# Altium PCB PCB1.PcbDoc
Units mil, origin at the board's own origin, x right, y up, seen from the top; angles counter-clockwise.
Board outline 2700 x 2100 mil, 2 copper layers (Top Layer, Bottom Layer), stack 62.8 mil thick; 15 components, 31 nets, 62 pads, 20 vias.
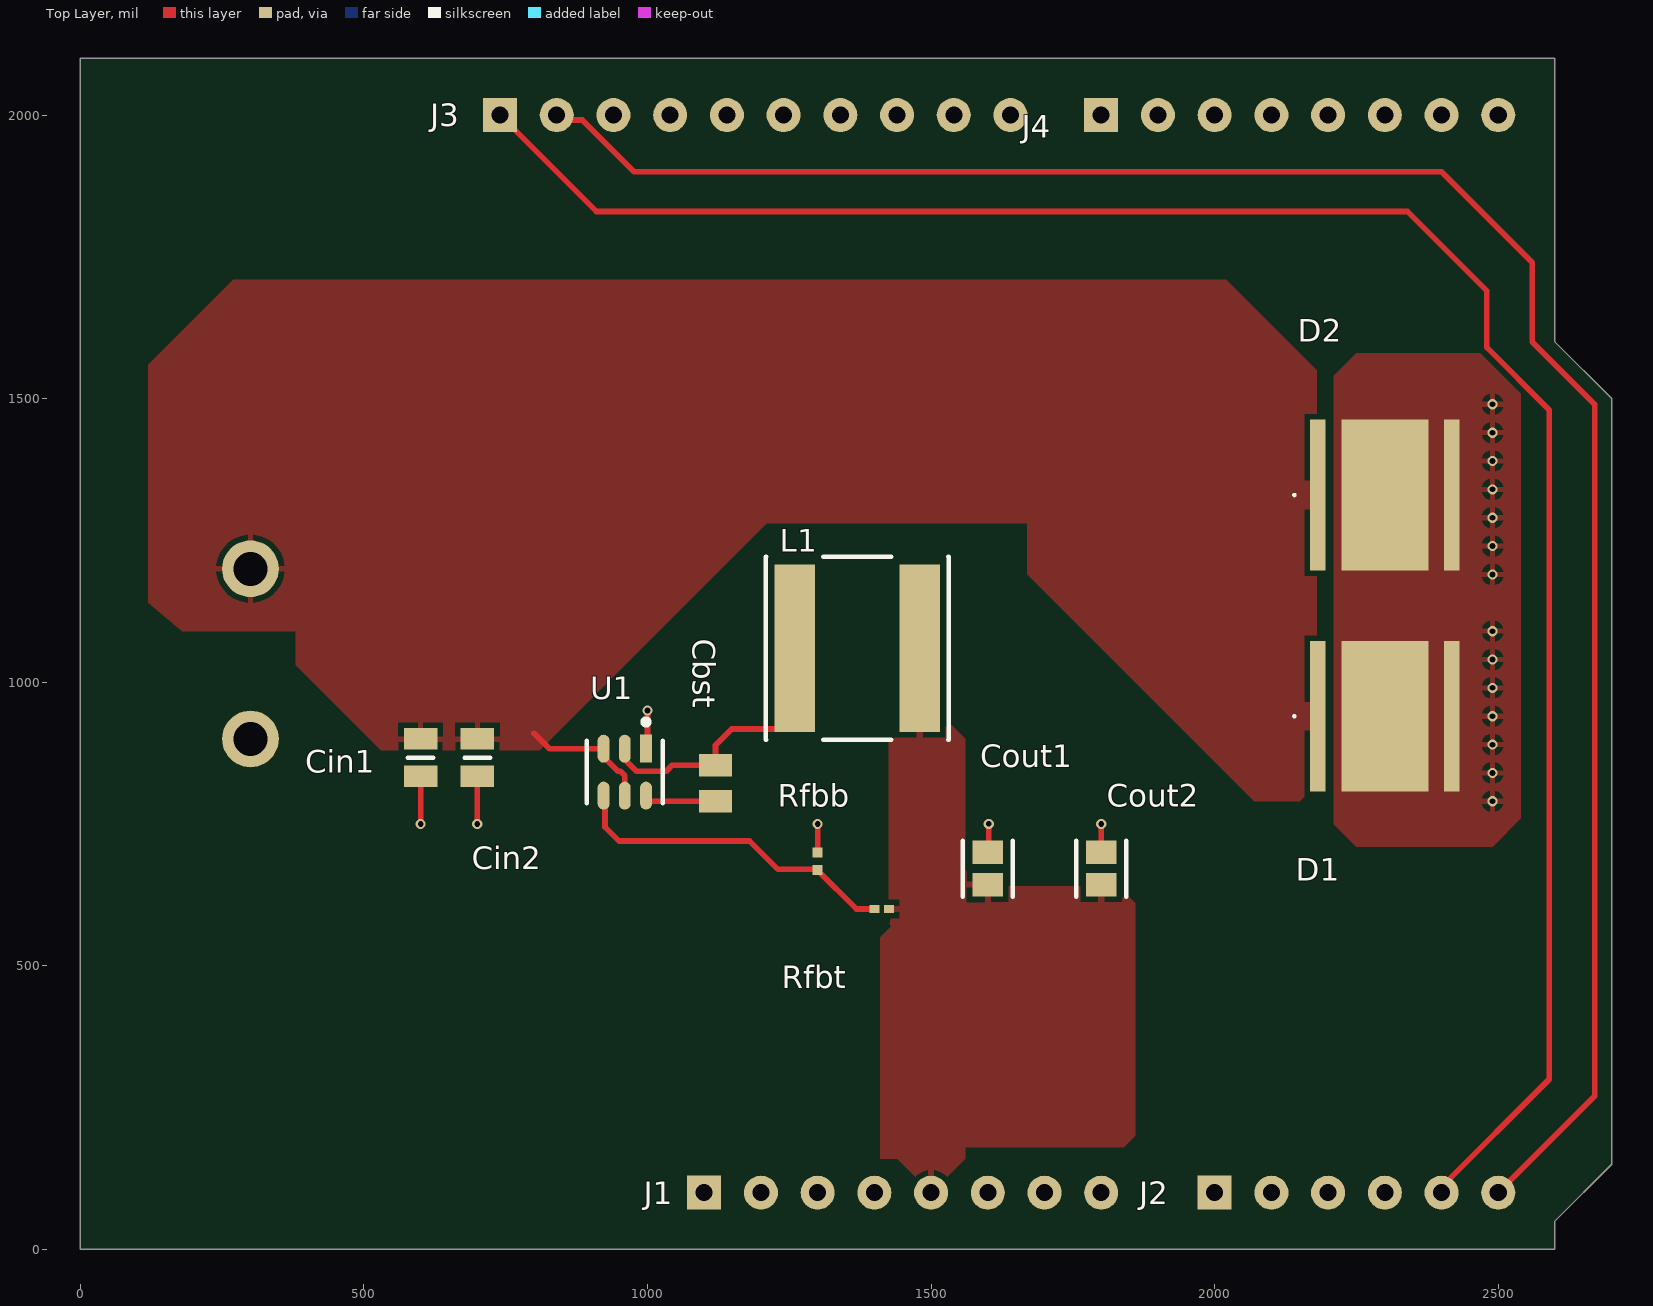
[diagram p0: Top Layer view]
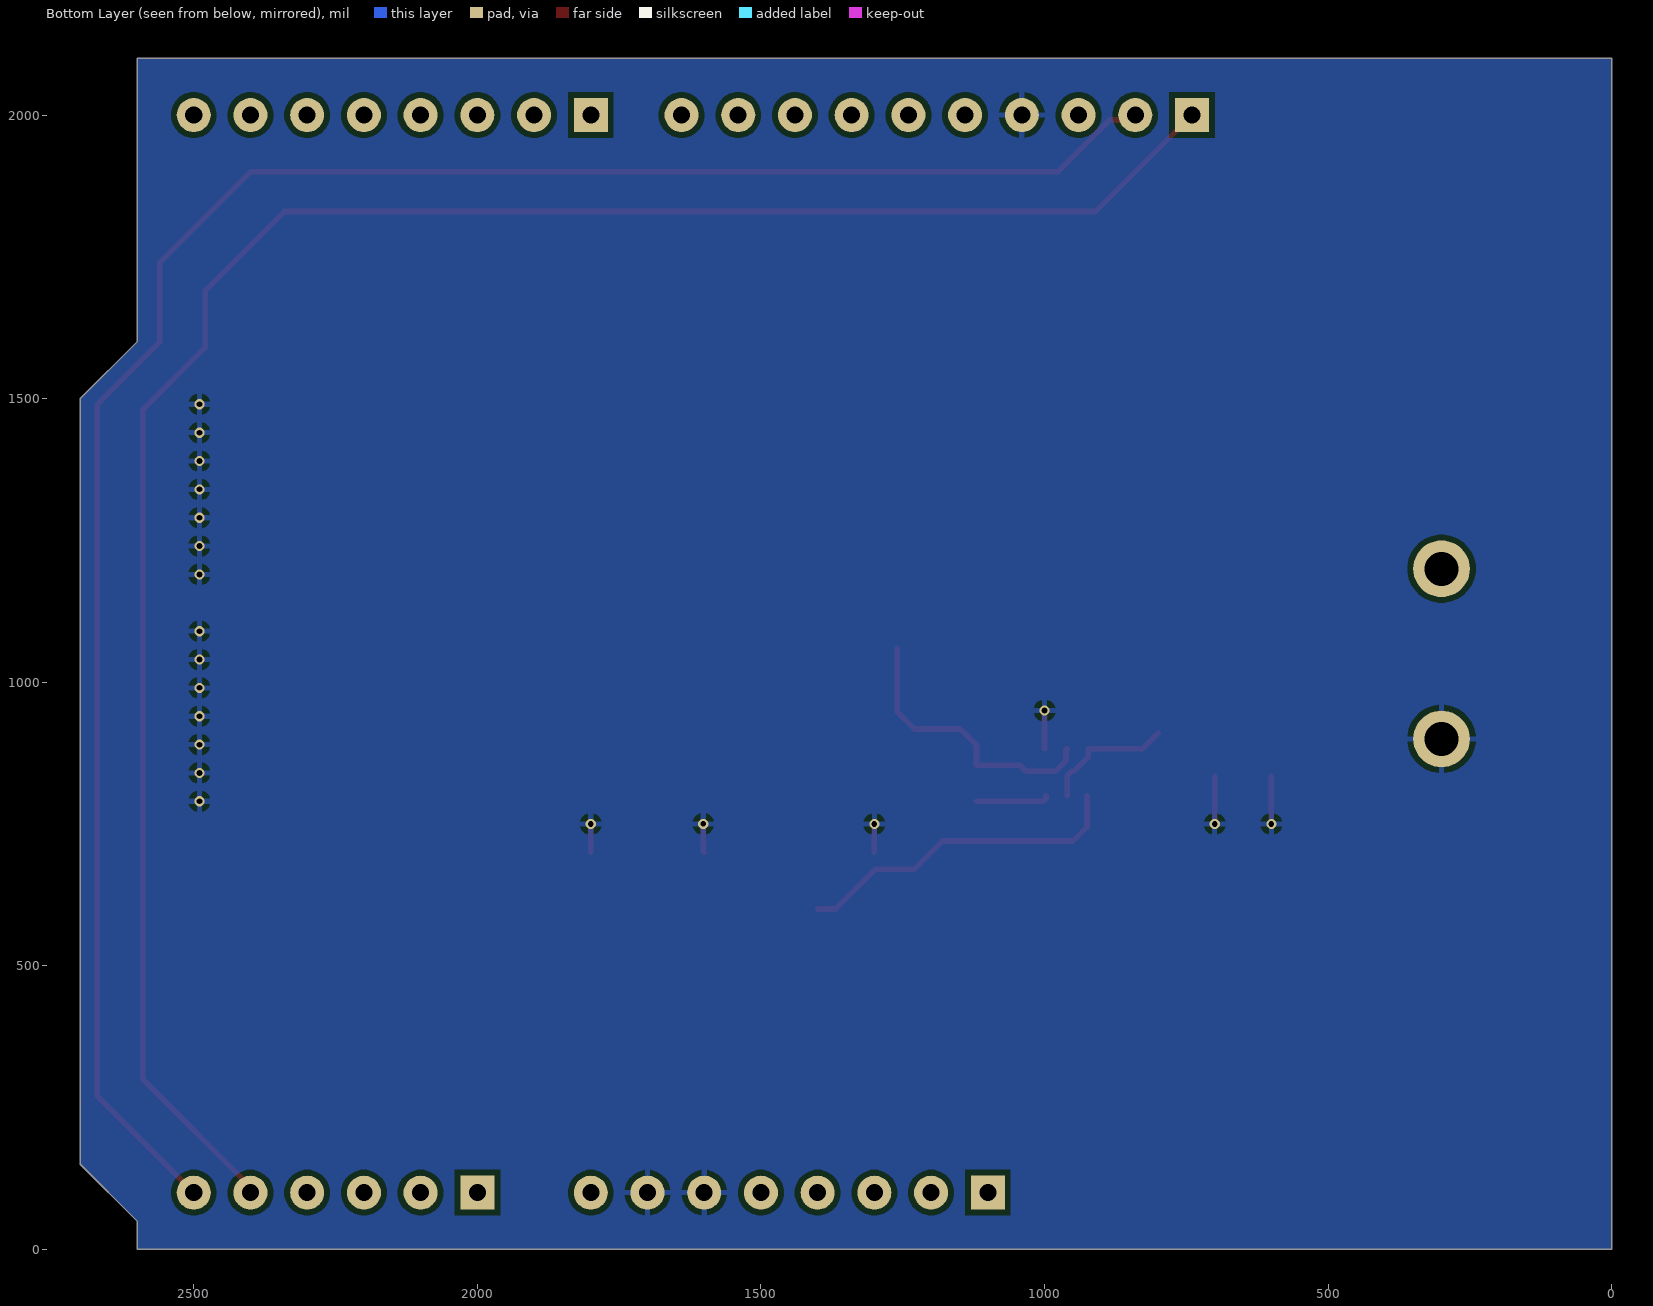
[diagram p1: Bottom Layer view, seen from below]

## Layer stack, top to bottom
Top Solder: solder mask 0.4, Solder Resist, Dk 3.5
Top Layer: signal copper 1.4
Dielectric 1: core 60, FR-4, Dk 4.8
Bottom Layer: signal copper 1.4
Bottom Solder: solder mask 0.4, Solder Resist, Dk 3.5

## Board outline
0,0 2600,0 2600,50 2700,150 2700,1500 2600,1600 2600,2100 0,2100

## Design rules (kind name [scope] priority, off if disabled: settings)
Clearance [All] p1: gap=10 ignorepadtopadclearanceinfootprint=TRUE
MinimumSolderMaskSliver [All] p1: minsoldermaskwidth=5
PolygonConnect [All] p1: connectstyle=Relief reliefconductorwidth=10 reliefentries=4 polygonreliefangle="90 Angle" airgapwidth=10
RoutingVias [All] p1: holewidth=10 width=18 viastyle="Through Hole" minholewidth=6 minwidth=14 maxholewidth=28 maxwidth=50
SolderMaskExpansion [All] p1: expansion=0 istentingtop=FALSE
SupplyNets "Schematic Supply Nets_2" [InNet('+12')] p1: voltage=0.000
SupplyNets "Schematic Supply Nets_1" [InNet('+5')] p2: voltage=0.000
SupplyNets "Schematic Supply Nets" [InNet('GND')] p3: voltage=0.000
Width [All] p1: maxlimit=10 minlimit=10 preferedwidth=10
29 further rules are at their usual default settings.

## Components (designator, comment, footprint, x,y, rotation, side; value= is the part's Value field where it differs from the comment)
Cbst "08053C104KAT2A" CAPC2012X94N 1120,821.89 r90 top
Cin1 "MSAST219LB5106KTNA01" CAPC2114X95N 600,866.93 r90 top
Cin2 "MSAST219LB5106KTNA01" CAPC2114X95N 700,866.93 r90 top
Cout1 "GRM21BR61A226ME44L" FP-GRM21B-0_2-e0_2_0_7-IPC_C 1600,671.43 r90 top
Cout2 "GRM21BR61A226ME44L" FP-GRM21B-0_2-e0_2_0_7-IPC_C 1800,671.43 r90 top
D1 "MKRAWT-00-0000-0D0HG235H" MKRAWT0000000D0HG235H 2300,940 r0 top
D2 "MKRAWT-00-0000-0D0HG235H" MKRAWT0000000D0HG235H 2300,1330 r0 top
J1 "1x8 Header" "1x8 Header" 1100,100 r0 top
J2 "1x6 Header" "1x6 Header" 2000,100 r0 top
J3 "1x10 Header" "1x10 Header" 740,2000 r0 top
J4 "1x8 Header" "1x8 Header" 1800,2000 r0 top
L1 "NRS8030T3R3MJGJ" FP-NRS8030-MFG 1369.76,1060 r0 top
Rfbb "ERJ2RKF1002X" RESC1005X40X25LL05T05 1300,684.25 r270 top
Rfbt "CRCW020156K2FNED" RESC0603X28X15NL05T05 1412.8,600 r0 top
U1 "TPS562201DDCR" FP-DDC0006A-IPC_C 960,841.35 r270 top

## Footprints (in the part's own frame and the unit in brackets; to place one, negate y for a bottom-side part, rotate by r counter-clockwise, add the part's x,y. Pads: shape width x height; smd on the part's side, far side on the other; paste and mask are expansions set on the pad)
"1x6 Header" [mil]
  rect 60x60 hole 30: 1(0,0)
  round 60 hole 30: 2(100,0) 3(200,0) 4(300,0) 5(400,0) 6(500,0)
"1x8 Header" [mil]
  rect 60x60 hole 30: 1(0,0)
  round 60 hole 30: 2(100,0) 3(200,0) 4(300,0) 5(400,0) 6(500,0) 7(600,0) 8(700,0)
"1x10 Header" [mil]
  rect 60x60 hole 30: 1(0,0)
  round 60 hole 30: 2(100,0) 3(200,0) 4(300,0) 5(400,0) 6(500,0) 7(600,0) 8(700,0) 9(800,0) 10(900,0)
CAPC2012X94N [mm]
  rect 1.02x1.47 smd: 1(-0.81,0) 2(0.81,0)
CAPC2114X95N [mm]
  rect 0.96x1.49 smd: 1(-0.84,0) 2(0.84,0)
  silkscreen extent 0,-0.58 0,0.58
FP-DDC0006A-IPC_C [mm]
  rect 1.254x0.532 smd paste+0 mask+0: 1(-1.05,0.95)
  rrect100% 1.254x0.532 smd paste+0 mask+0: 2(-1.05,0) 3(-1.05,-0.95) 4(1.05,-0.95) 5(1.05,0) 6(1.05,0.95)
  silkscreen extent -2.37,-1.7 1.4,1.7, body extent -1.78,-1.55 1.78,1.55, height 0.25
FP-GRM21B-0_2-e0_2_0_7-IPC_C [mil]
  rect 41.52x53.39 smd paste+0 mask+0: 1(-28.57,0) 2(28.57,0)
  silkscreen extent -49,-44 49,44, body extent -53,-32 53,32, height 10
FP-NRS8030-MFG [mm]
  rect 1.8x7.5 smd paste+0 mask+0: 1(-2.8,0) 2(2.8,0)
  silkscreen extent -4.1,-4.1 4.1,4.1, body extent -4.2,-4.2 4.2,4.2, height 0.25
MKRAWT0000000D0HG235H [mm]
  rect 0.7x6.76 smd: 1(-3,0) 2(3,0)
  rect 3.9x6.76 smd: 3(0,0)
  silkscreen extent -4.1,-0.05 -4,0.05
RESC0603X28X15NL05T05 [mm] "Chip Resistor, 2-Leads, Body 0.60x0.30mm, IPC Medium Density"
  rect 0.45x0.35 smd: 1(-0.325,0) 2(0.325,0)
  body extent -0.33,-0.17 0.33,0.18, height 0.28
RESC1005X40X25LL05T05 [mm] "Chip Resistor, 2-Leads, Body 1.05x0.55mm, IPC High Density"
  rect 0.45x0.45 smd: 1(-0.4,0) 2(0.4,0)
  body extent -0.53,-0.28 0.53,0.28, height 0.4

## Part data
Cbst: "0805 X7R ceramic capacitor, 25V 0.1uF AVX 0805 Standard 100nF Ceramic Multilayer Capacitor, 25 V dc X7R Dielectric  /-10% SMD", Manufacturer_Name="Kyocera AVX", Datasheet Link=http://datasheets.avx.com/X7RDielectric.pdf, Geometry.Height=0.94mm, Manufacturer_Part_Number=08053C104KAT2A
Cin1 Cin2: "Multilayer Ceramic Capacitors MLCC - SMD/SMT 25V 10uF X5R 0805 10%", Manufacturer_Name="TAIYO YUDEN", Datasheet Link=https://4donline.ihs.com/images/VipMasterIC/IC/TAIY/TAIY-S-A0026212580/TAIY-S-A0026217264-1.pdf?hkey=61A2E4C270F0397D049F8F05BD4F1054, Geometry.Height=0.95mm, Manufacturer_Part_Number=MSAST219LB5106KTNA01
Cout1 Cout2: library part CMP-06035-039918-1, "Chip Multilayer Ceramic Capacitors for General Purpose, 0805, 22uF, X5R, 15%, 20%, 10V", Capacitance=22uF, Case Code (Imperial)=0805, Case Code (Metric)=2012, Dielectric=X5R, Dielectric Material=Ceramic, Max Operating Temperature=85°C, Min Operating Temperature=-55°C, Package Quantity=3000, Tolerance=20%, Voltage=10V, Case/Package=0805, Depth=1.25mm, Dissipation Factor=0.035%, Height=1.25mm, Lead Free="Lead Free", Length=2mm, Mount="Surface Mount", Packaging="Tape and Reel", Resistor Type=Ceramic, Termination=SMD/SMT, Thickness=0.057inch, Voltage Rating=10V, Voltage Rating (DC)=10V, Weight=0.000335oz, Width=1.25mm
D1 D2: "LED Uni-Color White 3500K 80 2-Pin SMD EP T/R", Manufacturer_Name="CREE LED", Mouser Part Number=941-MKRAWT0D0HG235H, Datasheet Link=https://www.digikey.com/en/products/detail/cree-led/MKRAWT-00-0000-0D0HG235H/4437229, Geometry.Height=4.21mm, Manufacturer_Part_Number=MKRAWT-00-0000-0D0HG235H, Mouser Price/Stock=https://www.mouser.co.uk/ProductDetail/Cree-LED/MKRAWT-00-0000-0D0HG235H?qs=TqB%2FzLOUcHLtwo74coesIQ%3D%3D
L1: library part CMP-14484-000405-1, "Inductor Power Shielded Wirewound 3.3uH 20% 100KHz Ferrite 4.2A 24.7mΩ DCR T/R", Case/Package=Nonstandard, Current Rating=4.3A, DC Resistance (DCR)=19mR, Inductance=3.3uH, Inductance Tolerance=20%, Max DC Current=4.2A, Max Operating Temperature=125°C, Min Operating Temperature=-25°C, Package Quantity=1000, Resistor Type=Wirewound, Self Resonant Frequency=50MHz, Test Frequency=100kHz, Core Material=Ferrite, Depth=8.2mm, Halogen Free="Halogen Free", Height=3mm, Height - Seated (Max)=0.118inch, Lead Free="Lead Free", Lead Pitch=5.6mm, Length=8mm, Mount="Surface Mount", Number of Pins=2, Packaging="Tape and Reel", Radiation Hardening=No, REACH SVHC="No SVHC", RMS Current (Irms)=4.3A, RoHS Compliant=Yes, Saturation Current=4.2A, Series=NRS, Shielding=Shielded, Termination=SMD/SMT, Tolerance=20%, Width=0.315inch
Rfbb: library part CMP-2000-07588-1, "Chip Resistor, 10 KOhm, +/- 1%, 0.1 W, -55 to 155 degC, 0402 (1005 Metric), RoHS, Tape and Reel", Case Code (Imperial)=0402, Case Code (Metric)=1005, Manufacturer=Panasonic, Max Operating Temperature=155degC, Max Power Dissipation=100mW, Min Operating Temperature=-55degC, Package Description="2-Pin Surface Mount Device, Body 1 x 0.5 mm", Package Quantity=1, Package Reference=402, Resistance=10KOhm, Temperature Coefficient=100ppm\/degreesC, Tolerance=1%, Voltage Rating=50V, Case\/Package=0402, Composition=ThickFilm, Contact Plating=Tin, Datasheet URL=https://industrial.panasonic.com/cdbs/www-data/pdf/RDA0000/AOA0000C304.pdf, Datasheet Version=02/2017, Depth=0.5mm, Height=0.35mm, Lead Free=LeadFree, Length=1mm, Manufacturer URL=http://www.panasonic.com/, Military Standard=Not, Mount=SurfaceMount, Mounting Technology=SurfaceMount, Number of Pins=2, Number of Terminations=2, Packaging=TapeandReel, Power Rating=100mW, Radiation Hardening=No, REACH SVHC=NoSVHC, RoHSCompliant=True, Termination=SMD/SMT, Voltage Rating (DC)=50V, Width=0.02inch
Rfbt: library part CMP-2004-00723-1, Manufacturer="Vishay Dale", Part Number=CRCW020156K2FNED
U1: library part CMP-04918-000361-1, "IC REG BUCK ADJ 2A TSOT23-6", Case/Package=SOT, Max Input Voltage=17V, Max Operating Temperature=125°C, Max Output Current=2A, Min Input Voltage=4.5V, Min Operating Temperature=-40°C, Output Voltage=7V, Quiescent Current=400uA, Switching Frequency=580kHz, Contact Plating=Tin, Lead Free="Lead Free", Mount="Surface Mount", Number of Outputs=1, Number of Pins=6, Operating Supply Voltage=17V, Output Type=Adjustable, RoHS Compliant=Yes

## Free pads (board coordinates)
  round 100 hole 60: 26(300,900) 26(300,1200)

## Via types
v1: diameter 18, hole 10, Top Layer to Bottom Layer, 20 vias

## Nets (pads, with @x,y where several pads share a name; then routed paths per layer and width w, separated by ;. In a path a pad name is that pad's centre, name@x,y a point inside that pad or via, vN(x,y) a via of type N, cw(c..) or ccw(c..) an arc to the next point about the centre after c; other vN are vias at no path point)
3.3V: J1.4
+5: Cout1.1 Cout2.1 J1.5 L1.2 Rfbt.2
+12: Cin1.2 Cin2.2 D1.1 D2.1 pad.26@300,1200 U1.3 U1.5 | length 234.7
  Top Layer w10: 800,910 827.3,882.7 U1.3 922.6,868.48 948.07,843.01 952.43,843.01 960,835.44 U1.5
A0: J2.1
A1: J2.2
A2: J2.3
A3: J2.4
A4: J2.5 J3.1 | length 3582.7
  Top Layer w10: J3.1 910,1830 2340,1830 2480,1690 2480,1590 2590,1480 2590,300 2400,110 J2.5
A5: J2.6 J3.2 | length 3583.7
  Top Layer w10: J3.2 848.64,1991.36 885,1991.36 976.36,1900 2400,1900 2560,1740 2560,1600 2670,1490 2670,270 J2.6
AREF: J3.3
D0: J4.8
D1: J4.7
D2: J4.6
D3: J4.5
D4: J4.4
D5: J4.3
D6: J4.2
D7: J4.1
D8: J3.10
D9: J3.9
D10: J3.8
D11: J3.7
D12: J3.6
D13: J3.5
GND: Cin1.1 Cin2.1 Cout1.2 Cout2.2 D1.2 D1.3 D2.2 D2.3 J1.6 J1.7 J3.4 pad.26@300,900 Rfbb.1 U1.1 | length 385.9
  Top Layer w10: v1(600,750) Cin1.1 ; v1(700,750) Cin2.1 ; U1.1@1000,882.7 v1(1000,950) ; Rfbb.1 v1(1300,750) ; Cout1.2 1601.61,701.61 v1(1601.61,750.2) ; Cout2.2 v1(1800,750)
  other v1: 2490,790 2490,840 2490,890 2490,940 2490,990 2490,1040 2490,1090 2490,1190 2490,1240 2490,1290 2490,1340 2490,1390 2490,1440 2490,1490
IOREF: J1.2
N-C: J1.1
NetCbst_1: Cbst.1 U1.6 | length 129.6
  Top Layer w10: U1.6 997.4,795.06 1002.46,790 Cbst.1
NetRfbb_2: Rfbb.2 Rfbt.1 U1.4 | length 590
  Top Layer w10: U1.4@925.2,800 925.2,744.8 950,720 1180,720 1230,670 1298.5,670 Rfbb.2 1368.5,600 Rfbt.1
RESET: J1.3
"SW OUT": Cbst.2 L1.1 U1.2 | length 503.2
  Top Layer w10: U1.2 962.1,880.61 962.1,861.63 980.71,843.01 1033,843.01 1043.77,853.78 Cbst.2 1120,888.86 1148.5,917.36 1229.09,917.36 1259.53,947.8 L1.1
pads on no net: J1.8

## Polygon pours and split planes (outlines as drawn)
GND on Bottom Layer "GND_L02_P000" (solid, pour order 0): 2600,0 2600,50 2700,150 2700,1500 2600,1600 2600,2100 0,2100 0,0
+12 on Top Layer "+12_L01_P006" (solid, pour order 6): 180,1090 380,1090 380,1030 530,880 810,880 1210,1280 1670,1280 1670,1190 2070,790 2150,790 2180,820 2180,1550 2020,1710 270,1710 120,1560 120,1140
+5 on Top Layer "+5_L01_P008" (solid, pour order 8): 1430,930 1530,930 1560,900 1560,670 1590,640 1830,640 1860,610 1860,200 1840,180 1560,180 1560,160 1500,100 1440,160 1410,160 1410,550 1430,570 1425.59,574.41 1425.59,905.59 1460,940
GND on Top Layer "GND_L01_P004" (solid, pour order 4): 2210,750 2250,710 2490,710 2540,760 2540,1510 2470,1580 2250,1580 2210,1540